# EAGLE board CT_schematic (EAGLE 7.6.0)

Size 100 x 80 mm. Coordinates in mm from the lower left corner, seen from the top.
Outline: 0,0 100,0 100,80 0,80 0,0
Copper layers (1*16): Top 0.035mm / dielectric 1.5mm / Bottom 0.035mm
Design rules "default": minimum track width 10mil, minimum drill 24mil, track to track 8mil, track to pad 8mil, pad to pad 8mil, via to via 8mil, smd to smd 8mil, copper to edge 40mil, drill to drill 8mil, minimum pad ring 10mil, minimum via ring 8mil, stop-mask expansion 4mil, vias tented up to drill 0mil, thermal gap 10mil

## Footprints (pad centres in the part's own frame; a part is rotated, then mirrored left to right if it is on the bottom)
C0603 = smd 0.8 x 0.8: 1 -0.762,0; 2 0.762,0
C0402 = smd 0.5 x 0.5: 1 -0.508,0; 2 0.508,0
C0805 = smd 1.2 x 1.3: 1 -1.016,0; 2 1.016,0
C1210 = smd 1.2 x 2.5: 1 -1.524,0; 2 1.524,0
C1206 = smd 1.3 x 1.6: 1 -1.524,0; 2 1.524,0
DR1040 = smd 1.6 x 3.2: 1 -4.458,0; 2 4.458,0
R0603 = smd 0.8 x 0.8: 1 -0.762,0; 2 0.762,0
LQFP144 = smd 0.35 x 1.35: 1 -8.75,-10.625; 2 -8.25,-10.625; 3 -7.75,-10.625; 4 -7.25,-10.625; 5 -6.75,-10.625; 6 -6.25,-10.625; 7 -5.75,-10.625; 8 -5.25,-10.625; 9 -4.75,-10.625; 10 -4.25,-10.625; 11 -3.75,-10.625; 12 -3.25,-10.625; 13 -2.75,-10.62; 14 -2.25,-10.625; 15 -1.75,-10.625; 16 -1.25,-10.625; 17 -0.75,-10.625; 18 -0.25,-10.625; 19 0.25,-10.625; 20 0.75,-10.625; 21 1.25,-10.625; 22 1.75,-10.625; 23 2.25,-10.625; 24 2.75,-10.62; 25 3.25,-10.625; 26 3.75,-10.625; 27 4.25,-10.625; 28 4.75,-10.625; 29 5.25,-10.625; 30 5.75,-10.625; 31 6.25,-10.625; 32 6.75,-10.625; 33 7.25,-10.625; 34 7.75,-10.625; 35 8.25,-10.625; 36 8.75,-10.625; 73 8.75,10.625; 74 8.25,10.625; 75 7.75,10.625; 76 7.25,10.625; 77 6.75,10.625; 78 6.25,10.625; 79 5.75,10.625; 80 5.25,10.625; 81 4.75,10.625; 82 4.25,10.625; 83 3.75,10.625; 84 3.25,10.625; 85 2.75,10.625; 86 2.25,10.625; 87 1.75,10.625; 88 1.25,10.625; 89 0.75,10.625; 90 0.25,10.625; 91 -0.25,10.625; 92 -0.75,10.625; 93 -1.25,10.625; 94 -1.75,10.625; 95 -2.25,10.625; 96 -2.75,10.625; 97 -3.25,10.625; 98 -3.75,10.625; 99 -4.25,10.625; 100 -4.75,10.625; 101 -5.25,10.625; 102 -5.75,10.625; 103 -6.25,10.625; 104 -6.75,10.625; 105 -7.25,10.625; 106 -7.75,10.625; 107 -8.25,10.625; 108 -8.75,10.625 | smd 1.35 x 0.35: 37 10.625,-8.75; 38 10.625,-8.25; 39 10.625,-7.75; 40 10.625,-7.25; 41 10.625,-6.75; 42 10.625,-6.25; 43 10.625,-5.75; 44 10.625,-5.25; 45 10.625,-4.75; 46 10.625,-4.25; 47 10.625,-3.75; 48 10.625,-3.25; 49 10.625,-2.75; 50 10.625,-2.25; 51 10.625,-1.75; 52 10.625,-1.25; 53 10.625,-0.75; 54 10.625,-0.25; 55 10.625,0.25; 56 10.625,0.75; 57 10.625,1.25; 58 10.625,1.75; 59 10.625,2.25; 60 10.625,2.75; 61 10.625,3.25; 62 10.625,3.75; 63 10.625,4.25; 64 10.625,4.75; 65 10.625,5.25; 66 10.625,5.75; 67 10.625,6.25; 68 10.625,6.75; 69 10.625,7.25; 70 10.625,7.75; 71 10.625,8.25; 72 10.625,8.75; 109 -10.625,8.75; 110 -10.625,8.25; 111 -10.625,7.75; 112 -10.625,7.25; 113 -10.625,6.75; 114 -10.625,6.25; 115 -10.625,5.75; 116 -10.625,5.25; 117 -10.625,4.75; 118 -10.625,4.25; 119 -10.625,3.75; 120 -10.625,3.25; 121 -10.625,2.75; 122 -10.625,2.25; 123 -10.625,1.75; 124 -10.625,1.25; 125 -10.625,0.75; 126 -10.625,0.25; 127 -10.625,-0.25; 128 -10.625,-0.75; 129 -10.625,-1.25; 130 -10.625,-1.75; 131 -10.625,-2.25; 132 -10.625,-2.75; 133 -10.625,-3.25; 134 -10.625,-3.75; 135 -10.625,-4.25; 136 -10.625,-4.75; 137 -10.625,-5.25; 138 -10.625,-5.75; 139 -10.625,-6.25; 140 -10.625,-6.75; 141 -10.625,-7.25; 142 -10.625,-7.75; 143 -10.625,-8.25; 144 -10.625,-8.75
TDFN-8/6MM = smd 0.3 x 0.75: 1 0,0; 2 0.5,0; 3 1,0; 4 1.5,0; 5 1.5,3; 6 1,3; 7 0.5,3; 8 0,3
QFN-32 = smd 0.6 x 0.3: 1 -2.3,1.75; 2 -2.3,1.25; 3 -2.3,0.75; 4 -2.3,0.25; 5 -2.3,-0.25; 6 -2.3,-0.75; 7 -2.3,-1.25; 8 -2.3,-1.75; 17 2.3,-1.75; 18 2.3,-1.25; 19 2.3,-0.75; 20 2.3,-0.25; 21 2.3,0.25; 22 2.3,0.75; 23 2.3,1.25; 24 2.3,1.75 | smd 0.3 x 0.6: 9 -1.75,-2.3; 10 -1.25,-2.3; 11 -0.75,-2.3; 12 -0.25,-2.3; 13 0.25,-2.3; 14 0.75,-2.3; 15 1.25,-2.3; 16 1.75,-2.3; 25 1.75,2.3; 26 1.25,2.3; 27 0.75,2.3; 28 0.25,2.3; 29 -0.25,2.3; 30 -0.75,2.3; 31 -1.25,2.3; 32 -1.75,2.3 | smd 3.2 x 3.2: EXP 0,0
SJ-43515TS-SMT-TR = smd 2.2 x 3: 1 0.6,-7.4; 4 3.4,-7.4 | smd 3 x 3: 2 12.8,-7.4; 5 17,-3 | smd 2 x 3: 3 5.3,0; 6 2.5,0 | drill 1.8: P$7 4.5,-3.69; P$8 11.54,-3.69
WM-64PC = drill 0.6 pad 1: 1 -1,0.95; 2 -1,-0.95
WFDN-8 = smd 0.48 x 0.7: 1 0,0; 2 1.27,0; 3 2.54,0; 4 3.81,0; 5 3.81,4.45; 6 2.54,4.45; 7 1.27,4.45; 8 0,4.45 | smd 4 x 3: 9 1.89,2.25
FCI_10118193-0001LF = smd 0.4 x 1.35: 1 -1.3,2.675; 2 -0.65,2.675; 3 0,2.675; 4 0.65,2.675; 5 1.3,2.675 | smd 1.6 x 1.4: 6 -3.2,2.45; 7 3.2,2.45 | smd 1.9 x 1.9: 8 -1.2,0; 9 1.2,0 | hole 0.5: -3.3,0; 3.3,0
SOT143B = smd 1 x 0.7: 1 -0.75,-1 | smd 0.6 x 0.7: 2 0.95,-1; 3 0.95,1; 4 -0.95,1
ABLS-25.000MHZ-B2F-T = smd 5.6 x 2.8: 1 -3.81,0; 2 5.69,0
ASEK = smd 1.4 x 1: 1 -1.1,-0.8; 2 1.1,-0.8; 3 1.1,0.8; 4 -1.1,0.8
ASFL1 = smd 1.7 x 1.5: 1 -1.27,-1.1; 2 1.27,-1.1; 3 1.27,1.1; 4 -1.27,1.1
TSOT-23-5 = smd 1.3 x 0.62: 1 -1.31,0.95; 2 -1.31,0; 3 -1.31,-0.95; 4 1.31,-0.95; 5 1.31,0.95
SOIC-8_EP = smd 1.6 x 0.533: 1 -2.921,1.905; 2 -2.921,0.635; 3 -2.921,-0.635; 4 -2.921,-1.905; 5 2.921,-1.905; 6 2.921,-0.635; 7 2.921,0.635; 8 2.921,1.905 | smd 2.54 x 3.302: EPAD 0,0 | drill 0.406 pad 0.406: P$1 -0.508,0.635; P$2 0.381,0.635; P$3 -0.508,-0.635; P$4 0.381,-0.635
DFN8_2X3MC = smd 0.813 x 0.305: 1 -1.398,0.75; 2 -1.398,0.25; 3 -1.398,-0.25; 4 -1.398,-0.75; 5 1.398,-0.75; 6 1.398,-0.25; 7 1.398,0.25; 8 1.398,0.75 | smd 1.753 x 1.549: 9 0,0
JST-2-SMD = smd 1 x 4.6: 1 -1,-3.7; 2 1,-3.7 | smd 1.6 x 3.4: NC1 -3.4,1.5; NC2 3.4,1.5
SON-6 = smd 0.55 x 0.3: 1 -0.355,0.5 | smd 0.52 x 0.3: 2 -0.37,0; 3 -0.37,-0.5; 4 0.37,-0.5; 5 0.37,0; 6 0.37,0.5
SW_4-1437565-2 = smd 1.4 x 2.1: 1 -2.23,4.55; 2 -2.23,-4.55; 3 2.23,4.55; 4 2.23,-4.55
LGM67K-G1J2-24-Z = smd 0.8 x 1.4: A -2,0; C 0,0
NC7SZ125M5X = smd 1.3 x 0.7: 1 -1.3,0.95; 2 -1.3,0; 3 -1.3,-0.95; 4 1.3,-0.95; 5 1.3,0.95

## Placement (x,y rotation side)
C1  1e-06  [C0603]  -83.82,77.47 0 top  (outside the outline)
C2  1e-07  [C0603]  -15.24,82.55 0 top  (outside the outline)
C3  1e-07  [C0603]  -19.05,82.55 0 top  (outside the outline)
C4  1e-07  [C0603]  -22.86,82.55 0 top  (outside the outline)
C5  1e-07  [C0603]  -26.67,82.55 0 top  (outside the outline)
C6  1e-07  [C0603]  -30.48,82.55 0 top  (outside the outline)
C7  1e-07  [C0603]  -34.29,82.55 0 top  (outside the outline)
C8  1e-07  [C0603]  -38.1,82.55 0 top  (outside the outline)
C9  1e-07  [C0603]  -41.91,82.55 0 top  (outside the outline)
C10  1e-07  [C0603]  -45.72,82.55 0 top  (outside the outline)
C11  1e-07  [C0603]  -49.53,82.55 0 top  (outside the outline)
C12  1e-07  [C0603]  -53.34,82.55 0 top  (outside the outline)
C13  1e-07  [C0603]  -57.15,82.55 0 top  (outside the outline)
C14  4.7e-06  [C0603]  -80.01,77.47 0 top  (outside the outline)
C15  1e-07  [C0603]  -60.96,82.55 0 top  (outside the outline)
C16  1e-07  [C0603]  -64.77,82.55 0 top  (outside the outline)
C17  1e-07  [C0603]  -68.58,82.55 0 top  (outside the outline)
C18  1e-08  [C0603]  -72.39,82.55 0 top  (outside the outline)
C19  1e-06  [C0603]  -76.2,82.55 0 top  (outside the outline)
C20  1e-11  [C0402]  -68.58,87.63 0 top  (outside the outline)
C21  1e-11  [C0402]  -72.39,87.63 0 top  (outside the outline)
C22  1e-08  [C0402]  -76.2,87.63 0 top  (outside the outline)
C23  1e-06  [C0603]  -80.01,82.55 0 top  (outside the outline)
C24  1e-06  [C0603]  -83.82,82.55 0 top  (outside the outline)
C25  1e-06  [C0603]  -15.24,87.63 0 top  (outside the outline)
C26  1e-06  [C0603]  -19.05,87.63 0 top  (outside the outline)
C27  1e-06  [C0603]  -22.86,87.63 0 top  (outside the outline)
C28  1e-06  [C0603]  -26.67,87.63 0 top  (outside the outline)
C29  1e-06  [C0603]  -30.48,87.63 0 top  (outside the outline)
C30  1e-07  [C0402]  -80.01,87.63 0 top  (outside the outline)
C31  1e-07  [C0402]  -83.82,87.63 0 top  (outside the outline)
C32  1e-07  [C0402]  -15.24,92.71 0 top  (outside the outline)
C33  1e-07  [C0402]  -19.05,92.71 0 top  (outside the outline)
C34  1e-06  [C0603]  -34.29,87.63 0 top  (outside the outline)
C35  1e-07  [C0402]  -22.86,92.71 0 top  (outside the outline)
C36  1e-08  [C0402]  -26.67,92.71 0 top  (outside the outline)
C37  1e-08  [C0402]  -30.48,92.71 0 top  (outside the outline)
C38  1e-05  [C0805]  -53.34,71.12 0 top  (outside the outline)
C39  1e-05  [C0805]  -58.42,71.12 0 top  (outside the outline)
C40  1e-05  [C1210]  -77.47,64.77 0 top  (outside the outline)
C41  1e-05  [C1210]  -16.51,72.39 0 top  (outside the outline)
C42  1e-05  [C1210]  -22.86,72.39 0 top  (outside the outline)
C43  1e-05  [C1210]  -29.21,72.39 0 top  (outside the outline)
C44  1e-07  [C0402]  -34.29,92.71 0 top  (outside the outline)
C45  1e-05  [C1206]  -35.56,72.39 0 top  (outside the outline)
C46  1e-05  [C1206]  -41.91,72.39 0 top  (outside the outline)
C47  1e-08  [C0402]  -38.1,92.71 0 top  (outside the outline)
I1  3.8e-06  [DR1040]  -38.1,43.18 0 top  (outside the outline)
R2  1000.0  [R0603]  -38.1,87.63 0 top  (outside the outline)
R4  4700.0  [R0603]  -41.91,87.63 0 top  (outside the outline)
R5  2200.0  [R0603]  -45.72,87.63 0 top  (outside the outline)
R6  2200.0  [R0603]  -49.53,87.63 0 top  (outside the outline)
R7  10000.0  [R0603]  -40.64,77.47 0 top  (outside the outline)
R8  10000.0  [R0603]  -45.72,77.47 0 top  (outside the outline)
R9  10000.0  [R0603]  -50.8,77.47 0 top  (outside the outline)
R10  10000.0  [R0603]  -55.88,77.47 0 top  (outside the outline)
R11  1270.0  [R0603]  -53.34,87.63 0 top  (outside the outline)
R12  1270.0  [R0603]  -57.15,87.63 0 top  (outside the outline)
R13  100000.0  [R0603]  -83.82,71.12 0 top  (outside the outline)
R14  100000.0  [R0603]  -15.24,77.47 0 top  (outside the outline)
R15  100000.0  [R0603]  -20.32,77.47 0 top  (outside the outline)
R16  490000.0  [R0603]  -25.4,77.47 0 top  (outside the outline)
R17  1000000.0  [R0603]  -78.74,71.12 0 top  (outside the outline)
R18  4031.5447154472  [R0603]  -73.66,71.12 0 top  (outside the outline)
R19  2200.0  [R0603]  -60.96,87.63 0 top  (outside the outline)
R20  10000.0  [R0603]  -60.96,77.47 0 top  (outside the outline)
R21  10000.0  [R0603]  -66.04,77.47 0 top  (outside the outline)
R22  82000.0  [R0603]  -71.12,77.47 0 top  (outside the outline)
R23  300000.0  [R0603]  -30.48,77.47 0 top  (outside the outline)
R24  120000.0  [R0603]  -35.56,77.47 0 top  (outside the outline)
R25  2000.0  [R0603]  -64.77,87.63 0 top  (outside the outline)
R26  10000.0  [R0603]  -76.2,77.47 0 top  (outside the outline)
U1  STM32L486ZGT6  [LQFP144]  -24.13,11.43 0 top  (outside the outline)
U2  24AA64T-I/MNY  [TDFN-8/6MM]  -50.8,54.61 0 top  (outside the outline)
U3  SGTL5000XNAA3  [QFN-32]  -34.29,55.88 0 top  (outside the outline)
U4  SJ-43515TS-SMT-TR  [SJ-43515TS-SMT-TR]  -62.23,10.16 0 top  (outside the outline)
U5  SJ-43515TS-SMT-TR  [SJ-43515TS-SMT-TR]  -39.37,33.02 0 top  (outside the outline)
U6  SJ-43515TS-SMT-TR  [SJ-43515TS-SMT-TR]  -67.31,33.02 0 top  (outside the outline)
U7  WM-64PCT  [WM-64PC]  -20.32,55.88 0 top  (outside the outline)
U8  SST26WF016B-104I/MF  [WFDN-8]  -77.47,40.64 0 top  (outside the outline)
U9  10118193-0001LF  [FCI_10118193-0001LF]  -77.47,54.61 0 top  (outside the outline)
U10  prtr5v0u2ax  [SOT143B]  -50.8,92.71 0 top  (outside the outline)
U11  ABLS-25.000MHZ-B2F-T  [ABLS-25.000MHZ-B2F-T]  -45.72,64.77 0 top  (outside the outline)
U12  ASEK-32.768KHz-ECST  [ASEK]  -29.21,64.77 0 top  (outside the outline)
U13  ASFL-24.57MHZ-NCS  [ASFL1]  -68.58,54.61 0 top  (outside the outline)
U14  ltc3406es5  [TSOT-23-5]  -63.5,71.12 0 top  (outside the outline)
U15  MIC5234YME  [SOIC-8_EP]  -57.15,64.77 0 top  (outside the outline)
U16  MCP73831T-2ACI/MC  [DFN8_2X3MC]  -60.96,91.44 0 top  (outside the outline)
U17  S2B-PH-SM4-TB(LF)(SN)  [JST-2-SMD]  -53.34,44.45 0 top  (outside the outline)
U18  TPS3895ADRYR  [SON-6]  -54.61,91.44 0 top  (outside the outline)
U19  4-1437565-2  [SW_4-1437565-2]  -27.94,44.45 0 top  (outside the outline)
U20  Q65110A2395  [LGM67K-G1J2-24-Z]  -66.04,64.77 0 top  (outside the outline)
U21  nc7sz125m5x  [NC7SZ125M5X]  -46.99,71.12 0 top  (outside the outline)

## Library data of the parts
C1-C47 I1 R2 R4-R26 U1-U21 = circuit_tree

## Nets
CLK_CRYSTAL_U1_23: C20.1 U1.23 U11.1
CLK_CRYSTAL_U1_24: C21.1 U1.24 U11.2
CLK_U1_8: U1.8 U12.3
CLK_U3_21: U3.21 U13.3
GND: C1.2 C2.2 C3.2 C4.2 C5.2 C6.2 C7.2 C8.2 C9.2 C10.2 C11.2 C12.2 C13.2 C14.2 C15.2 C16.2 C17.2 C18.2 C19.2 C20.2 C21.2 C22.2 C30.2 C31.2 C32.2 C33.2 C34.2 C35.2 C36.2 C37.2 C38.2 C39.1 C39.2 C40.2 C41.2 C42.2 C43.2 C44.2 C45.2 C46.2 C47.2 R2.2 R7.2 R8.2 R9.2 R12.2 R16.2 R19.2 R22.2 R24.2 R25.2 U1.16 U1.30 U1.31 U1.38 U1.51 U1.61 U1.71 U1.83 U1.94 U1.107 U1.120 U1.130 U1.143 U2.4 U2.7 U3.1 U3.3 U3.7 U3.EXP U5.1 U6.1 U7.2 U8.4 U8.9 U9.5 U9.6 U9.7 U9.8 U9.9 U10.1 U12.2 U13.2 U14.2 U15.7 U15.EPAD U16.6 U16.9 U17.2 U18.2 U20.C U21.1 U21.3
INPUT_USBPOWER_5V: C45.1 R26.2 U9.1 U10.4 U16.1 U16.2
NET_U1_25: R4.1 U1.25 U21.4
NET_U1_128: R6.1 U1.128 U2.5
NET_U1_129: R5.1 U1.129 U2.6
NET_U1_138: R7.1 U1.138
NET_U1_141: U20.A
NET_U1_142: U19.3 U19.4
NET_U2_1: R8.1 U2.1
NET_U2_2: R9.1 U2.2
NET_U2_3: R10.1 U2.3
NET_U3_10: C33.1 U3.10
NET_U3_29: R11.1 U3.29
NET_U3_31: R12.1 U3.31
NET_U4_1: U3.4 U4.1
NET_U4_2: U3.2 U4.2
NET_U4_5: U3.6 U4.5
NET_U5_2: C24.1 U5.2
NET_U5_5: C23.1 U5.5
NET_U5_11: C24.2
NET_U5_12: C23.2
NET_U6_2: C26.1 C27.1 U6.2
NET_U6_5: C25.1 U6.5
NET_U6_13: C26.2 C27.2
NET_U6_14: C25.2
NET_U7_1: C28.1 C29.1 C34.1 U3.16 U7.1
NET_U7_15: C28.2 C29.2
NET_U14_1: U14.1
NET_U14_3: I1.1 U14.3
NET_U14_5: R16.1 R17.1 U14.5
NET_U14_ATNET_3: I1.2 R17.2
NET_U15_4: R18.2 R19.1 U15.4
NET_U16_5: R26.1 U16.5
NET_U16_8: R25.1 U16.8
NET_U18_1: R21.1 R22.1 U18.1
NET_U18_3: R23.2 R24.1 U18.3
NET_U18_4: R20.1 U18.4 U21.2
NET_U19_1: R2.1 U19.1 U19.2
PROC_QUADSPI_BK1_IO0: U1.47 U8.5
PROC_QUADSPI_BK1_IO1: U1.46 U8.2
PROC_QUADSPI_BK1_IO2: R14.1 U1.43 U8.3
PROC_QUADSPI_BK1_IO3: R15.1 U1.42 U8.7
PROC_QUADSPI_CLK: U1.63 U8.6
PROC_QUADSPI_NCS: R13.1 U1.64 U8.1
PROC_SAI1_FS_A: U1.3 U3.23
PROC_SAI1_SCK_A: U1.4 U3.24
PROC_SAI1_SD_A: U1.5 U3.26
PROC_USB_OTG_FS_DM: U9.2 U10.3
PROC_USB_OTG_FS_DP: U9.3 U10.2
VCC_S1_3V7: C38.1 C40.1 C41.1 C46.1 U14.4 U15.5 U15.8 U16.3 U16.4 U17.1
VCC_TIER1_1V8: C1.1 C2.1 C3.1 C4.1 C5.1 C6.1 C7.1 C8.1 C9.1 C10.1 C11.1 C12.1 C13.1 C14.1 C15.1 C16.1 C22.1 C30.1 C31.1 C32.1 C35.1 C39.2 C44.1 C47.1 I1.2 R4.2 R5.2 R6.2 R10.2 R11.2 R13.2 R14.2 R15.2 R17.2 R20.2 R21.2 R23.1 U1.6 U1.17 U1.39 U1.52 U1.62 U1.72 U1.84 U1.95 U1.108 U1.121 U1.131 U1.144 U2.8 U3.5 U3.20 U3.30 U8.8 U18.6 U21.5
VCC_TIER1_3V3: C17.1 C18.1 C19.1 C36.1 C37.1 C42.1 C43.1 R18.1 U1.32 U1.33 U1.106 U12.4 U13.4 U15.1

## Tracks (layer width: path | path; a pad name or v marks a point on that pad's centre or on a via)
CLK_CRYSTAL_U1_23  (2 unrouted)
CLK_CRYSTAL_U1_24  (2 unrouted)
CLK_U1_8  (1 unrouted)
CLK_U3_21  (1 unrouted)
GND  (92 unrouted)
INPUT_USBPOWER_5V  (5 unrouted)
NET_U1_25  (2 unrouted)
NET_U1_128  (2 unrouted)
NET_U1_129  (2 unrouted)
NET_U1_138  (1 unrouted)
NET_U1_142  (1 unrouted)
NET_U2_1  (1 unrouted)
NET_U2_2  (1 unrouted)
NET_U2_3  (1 unrouted)
NET_U3_10  (1 unrouted)
NET_U3_29  (1 unrouted)
NET_U3_31  (1 unrouted)
NET_U4_1  (1 unrouted)
NET_U4_2  (1 unrouted)
NET_U4_5  (1 unrouted)
NET_U5_2  (1 unrouted)
NET_U5_5  (1 unrouted)
NET_U6_2  (2 unrouted)
NET_U6_5  (1 unrouted)
NET_U6_13  (1 unrouted)
NET_U7_1  (4 unrouted)
NET_U7_15  (1 unrouted)
NET_U14_3  (1 unrouted)
NET_U14_5  (2 unrouted)
NET_U14_ATNET_3  (1 unrouted)
NET_U15_4  (2 unrouted)
NET_U16_5  (1 unrouted)
NET_U16_8  (1 unrouted)
NET_U18_1  (2 unrouted)
NET_U18_3  (2 unrouted)
NET_U18_4  (2 unrouted)
NET_U19_1  (2 unrouted)
PROC_QUADSPI_BK1_IO0  (1 unrouted)
PROC_QUADSPI_BK1_IO1  (1 unrouted)
PROC_QUADSPI_BK1_IO2  (2 unrouted)
PROC_QUADSPI_BK1_IO3  (2 unrouted)
PROC_QUADSPI_CLK  (1 unrouted)
PROC_QUADSPI_NCS  (2 unrouted)
PROC_SAI1_FS_A  (1 unrouted)
PROC_SAI1_SCK_A  (1 unrouted)
PROC_SAI1_SD_A  (1 unrouted)
PROC_USB_OTG_FS_DM  (1 unrouted)
PROC_USB_OTG_FS_DP  (1 unrouted)
VCC_S1_3V7  (9 unrouted)
VCC_TIER1_1V8  (55 unrouted)
VCC_TIER1_3V3  (13 unrouted)